# Altium PCB Main.PcbDoc (part 2 of 2)
Units mil, origin at the board's own origin, x right, y up, seen from the top; angles counter-clockwise.
Board outline 5100 x 2800 mil, 4 copper layers (Top Layer, Internal Plane 1, Internal Plane 2, Bottom Layer), stack 30.634 mil thick; 235 components, 176 nets, 754 pads, 178 vias.
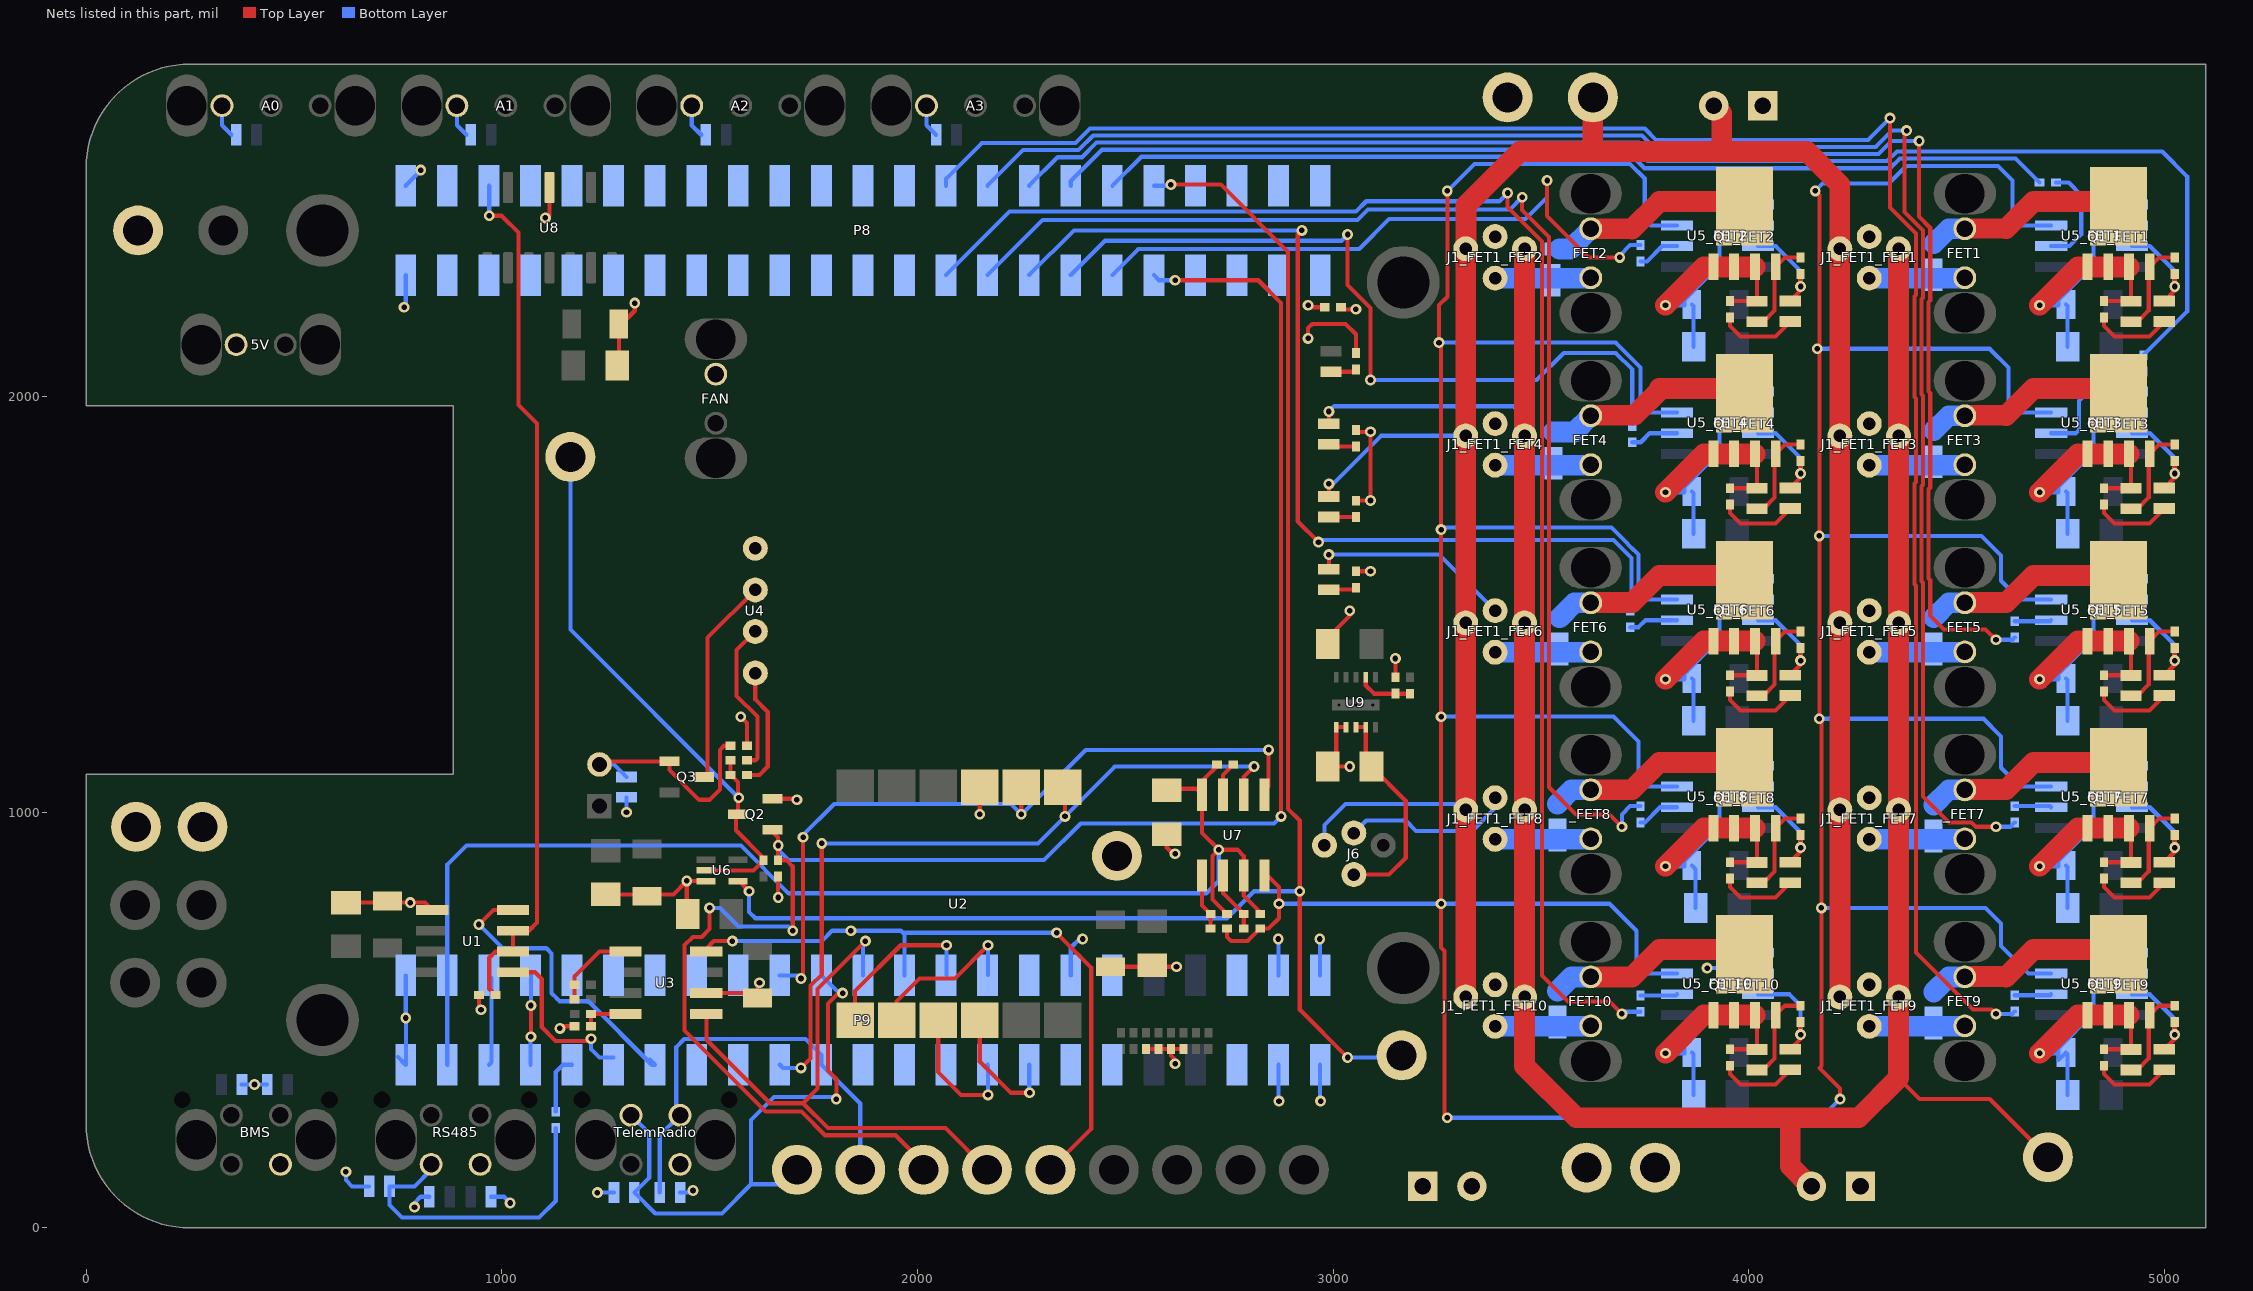
[diagram p4: the nets of this part, all layers, seen from the top]

## Via types
v1: diameter 26, hole 13.5, Top Layer to Bottom Layer, 173 vias
v2: diameter 40.16, hole 40.16, Top Layer to Bottom Layer, 3 vias
v3: diameter 175, hole 125, Top Layer to Bottom Layer, 2 vias

## Nets (pads, with @x,y where several pads share a name; then routed paths per layer and width w, separated by ;. In a path a pad name is that pad's centre, name@x,y a point inside that pad or via, vN(x,y) a via of type N, cw(c..) or ccw(c..) an arc to the next point about the centre after c; other vN are vias at no path point) (continued)
GND: 5V.1 A0.1 A1.1 A2.1 A3.1 BMS.1 C1.1 C2.1 C3.1 C4.1 C5.1 C6.1 C7.1 C8.1 C9.1 C11.1 C12.1 D9.3 D10.1 D11.3 D12.3 D13.3 D14.3 D15.3 D16.3 D17.3 D18.3 D19.3 D20.3 FAN.1 L1.1 P8.1 P8.2 P9.1 P9.2 P9.34 P9.43 P9.44 P9.45 P9.46 Q2.2 R6.2 R8.2 R15.1 R16.1 R17.1 R18.1 R23.2 R24.2 R29.1 R30.1 R35.2 RS485.1 TelemRadio.1 TP7.1 TP9.1 TP15.1 TP18.1 U1.5 U2.3 U3.2 U4.4 U5_FET1.3 U5_FET2.3 U5_FET3.3 U5_FET4.3 U5_FET5.3 U5_FET6.3 U5_FET7.3 U5_FET8.3 U5_FET9.3 U5_FET10.3 U6.3 U7.4 U8.11 | length 16310.2
  Top Layer w10: C4.1@625,782.6 v1(780,782.6) 815.16,782.6 U1.5@832.76,765 ; R6.2@945.31,560 945.31,529.69 v1(950,525) ; v1(1105,2430) 1105,2425 1115,2435 U8.11@1115,2503.31 ; v1@1150,485 R8.2@1175.31,485 ; C12.1@1250,802.4 1412.99,802.4 v1@1445,834.41 ; C2.1@1277.6,2075 1281.69,2079.09 C1.1@1281.69,2168.31 ; C1.1@1281.69,2175 C1.1@1281.69,2168.31 ; v1(1320,2225) 1320,2206.61 C1.1@1281.69,2168.31 ; C8.1@1447.4,755 1445,757.4 v1@1445,834.41 ; U6.3@1491.81,834.41 v1@1445,834.41 ; U3.2@1492.24,565 1603.31,565 C7.1@1615,553.31 1615,585 v1(1620,590) ; v1(1575,1230) 1590,1215 R24.2@1590,1160 ; Q2.2@1646.73,1032.4 Q2.2@1651.73,1032.4 1707.6,1032.4 v1(1710,1030) ; v1(1665,795) R23.2@1665,845.31 ; v1(2150,995) U2.3@2150,1060 ; C5.1@2465,628.31 v1(2623.31,628.31) ; R16.1@2550,430.32 R17.1@2580,430.32 R18.1@2610,430.32 ; C9.1@2600,943.31 2600,915 v1@2615,900 ; v1(2620,395) 2620,405 2610,415 R18.1@2610,430.32 ; R15.1@2640,430.32 R18.1@2610,430.32 ; R30.1@2744.69,720 2744.69,700.32 2755,690 2794.69,690 R29.1@2824.69,720 2845,720 2870,745 v1(2870,780) 2870,820 2842.24,847.76 U7.4@2835,847.76 ; v1(2940,2140) 2940,2165 2950,2175 3030,2175 3055,2150 R35.2@3055,2104.69 ; v1(2940,2220) 2945,2215 L1.1@2980,2215 ; v1(3275,265) 3268.5,271.5 3268.5,666.21 3260,674.71 v1(3260,780) v1(3260,1230) v1(3260,1680) 3260,2125 v1(3255,2130) 3255,2220.29 3275,2240.29 v1(3275,2495) ; v1(4160,2495) 4170,2485 v1@4170,2110 ; v1(4165,2115) v1@4170,2110 ; v1(4220,310) 4220,335 4170,385 4175,390 v1(4175,770) 4175,1220 v1(4170,1225) v1(4170,1665) v1@4170,2110
  Bottom Layer w10: A0.1@327,2700 327,2653 D12.3@350,2630 ; D20.3@374.21,345 D20.3@375,345 v1(405,345) D19.3@435,345 ; v1(625,135) 625,115 640,100 D11.3@680.79,100 ; P9.1@750,411.52 P9.1@769,392.52 P9.1@769,399.52 ; v1(765,2215) 769,2219 P8.1@769,2292.52 ; v1(769,505) P9.2@769,607.48 ; P8.2@769,2507.48 805,2543.48 v1(805,2545) ; P9.1@770,402.52 v1@770,505 ; v1(790,50) 790,60 805,75 D9.3@825.79,75 ; A1.1@892,2700 892,2653 D13.3@915,2630 ; D10.1@974.21,75 1005,75 v1(1020,60) ; v1(1230,85) D18.3@1270,85 ; v1(1300,1000) D16.3@1300,1035.79 ; D17.3@1429.21,85 1455,85 v1(1460,90) ; A2.1@1457,2700 1457,2653 D14.3@1480,2630 ; A3.1@2022,2700 2022,2653 D15.3@2045,2630 ; P9.34@2369,607.48 2369,674 2390,695 v1(2397.5,695) ; P9.43@2869,392.52 2869,306 v1(2870,305) ; P9.44@2869,607.48 v1@2869,694 ; v1(2870,780) v1(3260,780) 3665,780 3730,715 3730,634.02 3752.01,612.01 U5_FET10.3@3827.76,612.01 ; P9.45@2969,392.52 2969,306 v1(2970,305) ; P9.46@2969,607.48 v1@2969,694 ; v1(3255,2130) 3680,2130 3740,2070 3740,1974.02 3752.01,1962.01 U5_FET4.3@3827.76,1962.01 ; v1(3260,1230) 3675,1230 3735,1170 3735,1079.02 3752.01,1062.01 U5_FET8.3@3827.76,1062.01 ; v1(3260,1680) 3265,1685 3670,1685 3710,1645 3710,1644.64 3724.64,1630 3725,1630 3735,1620 3735,1529.02 3752.01,1512.01 U5_FET6.3@3827.76,1512.01 ; v1(3275,265) 4175,265 v1(4220,310) ; v1(3275,2495) 3340,2560 3714.79,2560 3750,2524.79 3750,2427.01 3765,2412.01 U5_FET2.3@3827.76,2412.01 ; v1(4160,2495) 4178,2513 4337.04,2513 4379.04,2555 4600,2555 4635,2520 4635,2429.02 4652.01,2412.01 U5_FET1.3@4727.76,2412.01 ; v1(4165,2115) 4580,2115 4625,2070 4625,1989.02 4652.01,1962.01 U5_FET3.3@4727.76,1962.01 ; v1(4170,1225) 4565,1225 4605,1185 4605,1184.64 4607,1182.64 4607,1107.02 4652.01,1062.01 U5_FET7.3@4727.76,1062.01 ; v1(4170,1665) 4560,1665 4607,1618 4607,1557.02 4652.01,1512.01 U5_FET5.3@4727.76,1512.01 ; v1(4175,770) 4570,770 4600,740 4600,739.64 4607,732.64 4607,678 4672.99,612.01 U5_FET9.3@4727.76,612.01
  other v1: 1140,480 2868,695 2968,695 1445,835 2620,900
Net_FET1_1: D1_FET1.1 FET1.1 J1_FET1_FET1.4 | length 230.4
  Bottom Layer w10: FET1.1@4519,2285 FET1.1@4520,2286
  Bottom Layer w50: J1_FET1_FET1.4@4290,2285 FET1.1@4519,2285
Net_FET1_2: D1_FET1.3 FET1.2 Q1_FET1.1 | length 532.9
  Top Layer w10: Q1_FET1.1@4915,2458.07 Q1_FET1.1@4943.94,2487.01
  Top Layer w50: FET1.2@4520.01,2405 4619.35,2404 4685,2469.65 4878.43,2469.65 Q1_FET1.1@4890,2458.07
  Bottom Layer w50: D1_FET1.3@4445,2367.8 4481.2,2404 FET1.2@4520,2404
Net_FET2_1: D1_FET2.1 FET2.1 J1_FET1_FET2.4 | length 230.4
  Bottom Layer w10: FET2.1@3619,2285 FET2.1@3620,2286
  Bottom Layer w50: J1_FET1_FET2.4@3390,2285 FET2.1@3619,2285
Net_FET2_2: D1_FET2.3 FET2.2 Q1_FET2.1 | length 538.2
  Top Layer w10: Q1_FET2.1@4015,2458.07 Q1_FET2.1@4043.94,2487.01
  Top Layer w50: FET2.2@3620,2404 3719.35,2404 ; 3719.35,2403 3785,2468.65 ; 3785,2469.65 3978.43,2469.65 Q1_FET2.1@3990,2458.07
  Bottom Layer w50: 3545,2355 3571,2355 FET2.2@3620,2404
Net_FET3_1: D1_FET3.1 FET3.1 J1_FET1_FET3.4 | length 230.4
  Bottom Layer w10: FET3.1@4519,1835 FET3.1@4520,1836
  Bottom Layer w50: J1_FET1_FET3.4@4290,1835 FET3.1@4519,1835
Net_FET3_2: D1_FET3.3 FET3.2 Q1_FET3.1 | length 532.9
  Top Layer w10: Q1_FET3.1@4915,2008.07 Q1_FET3.1@4943.94,2037.01
  Top Layer w50: FET3.2@4520,1955 4619.35,1955 ; 4619.35,1954 4685,2019.65 4878.43,2019.65 Q1_FET3.1@4890,2008.07
  Bottom Layer w50: D1_FET3.3@4445,1917.8 4481.2,1954 FET3.2@4520,1954
Net_FET4_1: D1_FET4.1 FET4.1 J1_FET1_FET4.4 | length 230.4
  Bottom Layer w10: FET4.1@3619,1835 FET4.1@3620,1836
  Bottom Layer w50: J1_FET1_FET4.4@3390,1835 FET4.1@3619,1835
Net_FET4_2: D1_FET4.3 FET4.2 Q1_FET4.1 | length 553.7
  Top Layer w10: Q1_FET4.1@4015,2008.07 Q1_FET4.1@4043.94,2037.01
  Top Layer w50: FET4.2@3620,1955 3725.35,1955 3790,2019.65 ; 3785,2019.65 3790,2019.65 ; Q1_FET4.1@3990,2008.07 3978.43,2019.65 3790,2019.65
  Bottom Layer w50: D1_FET4.3@3530,1914.8 3580.8,1914.8 FET4.2@3620,1954
Net_FET5_1: D1_FET5.1 FET5.1 J1_FET1_FET5.4 | length 230.4
  Bottom Layer w10: FET5.1@4519,1385 FET5.1@4520,1386
  Bottom Layer w50: J1_FET1_FET5.4@4290,1385 FET5.1@4519,1385
Net_FET5_2: D1_FET5.3 FET5.2 Q1_FET5.1 | length 532.9
  Top Layer w10: Q1_FET5.1@4915,1558.07 Q1_FET5.1@4943.94,1587.01
  Top Layer w50: FET5.2@4520,1505 4619.35,1505 ; 4619.35,1504 4685,1569.65 4878.43,1569.65 Q1_FET5.1@4890,1558.07
  Bottom Layer w50: D1_FET5.3@4445,1467.8 4481.2,1504 FET5.2@4520,1504
Net_FET6_1: D1_FET6.1 FET6.1 J1_FET1_FET6.4 | length 230.4
  Bottom Layer w10: FET6.1@3619,1385 FET6.1@3620,1386
  Bottom Layer w50: J1_FET1_FET6.4@3390,1385 FET6.1@3619,1385
Net_FET6_2: D1_FET6.3 FET6.2 Q1_FET6.1 | length 532.9
  Top Layer w10: Q1_FET6.1@4015,1558.07 Q1_FET6.1@4043.94,1587.01
  Top Layer w50: FET6.2@3620,1505 3719.35,1505 ; 3719.35,1504 3785,1569.65 3978.43,1569.65 Q1_FET6.1@3990,1558.07
  Bottom Layer w50: D1_FET6.3@3545,1467.8 3581.2,1504 FET6.2@3620,1504
Net_FET7_1: _FET7.1 D1_FET7.1 J1_FET1_FET7.4 | length 230.4
  Bottom Layer w10: _FET7.1@4519,935 _FET7.1@4520,936
  Bottom Layer w50: J1_FET1_FET7.4@4290,935 _FET7.1@4519,935
Net_FET7_2: _FET7.2 D1_FET7.3 Q1_FET7.1 | length 532.9
  Top Layer w10: Q1_FET7.1@4915,1108.07 Q1_FET7.1@4943.94,1137.01
  Top Layer w50: _FET7.2@4520,1055 4619.35,1055 ; 4619.35,1054 4685,1119.65 4878.43,1119.65 Q1_FET7.1@4890,1108.07
  Bottom Layer w50: D1_FET7.3@4445,1017.8 4481.2,1054 _FET7.2@4520,1054
Net_FET8_1: _FET8.1 D1_FET8.1 J1_FET1_FET8.4 | length 230.4
  Bottom Layer w10: _FET8.1@3619,935 _FET8.1@3620,936
  Bottom Layer w50: J1_FET1_FET8.4@3390,935 _FET8.1@3619,935
Net_FET8_2: _FET8.2 D1_FET8.3 Q1_FET8.1 | length 537
  Top Layer w10: Q1_FET8.1@4015,1108.07 Q1_FET8.1@4043.94,1137.01
  Top Layer w50: _FET8.2@3620,1054 3719.35,1054 3785,1119.65 3978.43,1119.65 Q1_FET8.1@3990,1108.07
  Bottom Layer w50: D1_FET8.3@3540,1020 3574,1054 _FET8.2@3620,1054
Net_FET9_1: D1_FET9.1 FET9.1 J1_FET1_FET9.4 | length 230.4
  Bottom Layer w10: FET9.1@4519,485 FET9.1@4520,486
  Bottom Layer w50: J1_FET1_FET9.4@4290,485 FET9.1@4519,485
Net_FET9_2: D1_FET9.3 FET9.2 Q1_FET9.1 | length 532.9
  Top Layer w10: Q1_FET9.1@4915,658.07 Q1_FET9.1@4943.94,687.01
  Top Layer w50: FET9.2@4520,605 4619.35,605 ; 4619.35,604 4685,669.65 4878.43,669.65 Q1_FET9.1@4890,658.07
  Bottom Layer w50: D1_FET9.3@4445,567.8 4481.2,604 FET9.2@4520,604
Net_FET10_1: D1_FET10.1 FET10.1 J1_FET1_FET10.4 | length 230.4
  Bottom Layer w10: FET10.1@3619,485 FET10.1@3620,486
  Bottom Layer w50: J1_FET1_FET10.4@3390,485 FET10.1@3619,485
Net_FET10_2: D1_FET10.3 FET10.2 Q1_FET10.1 | length 537.3
  Top Layer w10: Q1_FET10.1@4015,658.07 Q1_FET10.1@4043.94,687.01
  Top Layer w50: FET10.2@3620,604 3719.35,604 3785.35,670 3978.07,670 Q1_FET10.1@3990,658.07
  Bottom Layer w50: D1_FET10.3@3540,570 3574,604 FET10.2@3620,604
NetC10_2: C10.2 J6.4 U9.3 U9.4 | length 520.1
  Top Layer w10: J6.4@3050,850 3135,850 3175,890 3175,1027.6 C10.2@3092.6,1110 3078.62,1123.98 U9.4@3078.62,1204.96 U9.3@3055,1204.96
NetCommsDisable_2: CommsDisable.2 D16.1 Q3.1 R24.1 | length 556
  Top Layer w10: CommsDisable.2@1235,1115 1242.4,1122.4 Q3.1@1403.27,1122.4 1403.27,1101.73 1475,1030 1500,1030 1525,1055 1525,1150 1535,1160 R24.1@1550.63,1160
  Bottom Layer w10: CommsDisable.2@1235,1115 1270,1115 D16.1@1300,1085
NetD3_FET1_1: D3_FET1.1 Q1_FET1.2 R22_FET1.2 | length 230.3
  Top Layer w10: D3_FET1.1@4920,2180 4935,2180 4962.41,2207.41 4962.41,2312.01 Q1_FET1.2@4965,2312.01 4987.68,2334.69 R22_FET1.2@5025,2334.69
NetD3_FET2_1: D3_FET2.1 Q1_FET2.2 R22_FET2.2 | length 230.3
  Top Layer w10: D3_FET2.1@4020,2180 4035,2180 4062.41,2207.41 4062.41,2312.01 Q1_FET2.2@4065,2312.01 4087.68,2334.69 R22_FET2.2@4125,2334.69
NetD3_FET3_1: D3_FET3.1 Q1_FET3.2 R22_FET3.2 | length 230.3
  Top Layer w10: D3_FET3.1@4920,1730 4935,1730 4962.41,1757.41 4962.41,1862.01 Q1_FET3.2@4965,1862.01 4987.68,1884.69 R22_FET3.2@5025,1884.69
NetD3_FET4_1: D3_FET4.1 Q1_FET4.2 R22_FET4.2 | length 230.3
  Top Layer w10: D3_FET4.1@4020,1730 4035,1730 4062.41,1757.41 4062.41,1862.01 Q1_FET4.2@4065,1862.01 4087.68,1884.69 R22_FET4.2@4125,1884.69
NetD3_FET5_1: D3_FET5.1 Q1_FET5.2 R22_FET5.2 | length 230.3
  Top Layer w10: D3_FET5.1@4920,1280 4935,1280 4962.41,1307.41 4962.41,1412.01 Q1_FET5.2@4965,1412.01 4987.68,1434.69 R22_FET5.2@5025,1434.69
NetD3_FET6_1: D3_FET6.1 Q1_FET6.2 R22_FET6.2 | length 230.3
  Top Layer w10: D3_FET6.1@4020,1280 4035,1280 4062.41,1307.41 4062.41,1412.01 Q1_FET6.2@4065,1412.01 4087.68,1434.69 R22_FET6.2@4125,1434.69
NetD3_FET7_1: D3_FET7.1 Q1_FET7.2 R22_FET7.2 | length 230.3
  Top Layer w10: D3_FET7.1@4920,830 4935,830 4962.41,857.41 4962.41,962.01 Q1_FET7.2@4965,962.01 4987.68,984.69 R22_FET7.2@5025,984.69
NetD3_FET8_1: D3_FET8.1 Q1_FET8.2 R22_FET8.2 | length 230.3
  Top Layer w10: D3_FET8.1@4020,830 4035,830 4062.41,857.41 4062.41,962.01 Q1_FET8.2@4065,962.01 4087.68,984.69 R22_FET8.2@4125,984.69
NetD3_FET9_1: D3_FET9.1 Q1_FET9.2 R22_FET9.2 | length 230.3
  Top Layer w10: D3_FET9.1@4920,380 4935,380 4962.41,407.41 4962.41,512.01 Q1_FET9.2@4965,512.01 4987.68,534.69 R22_FET9.2@5025,534.69
NetD3_FET10_1: D3_FET10.1 Q1_FET10.2 R22_FET10.2 | length 230.3
  Top Layer w10: D3_FET10.1@4020,380 4035,380 4062.41,407.41 4062.41,512.01 Q1_FET10.2@4065,512.01 4087.68,534.69 R22_FET10.2@4125,534.69
NetD4_FET1_1: D4_FET1.1 R22_FET1.1 U5_FET1.6 U5_FET1.7 | length 290.3
  Top Layer w10: D4_FET1.1@5000,2230 5025,2255 R22_FET1.1@5025,2295.31
  Bottom Layer w10: U5_FET1.6@4922.24,2412.01 U5_FET1.7@4922.24,2362.01 4965,2362.01 5025,2302.01 v1(5025,2265)
NetD4_FET1_3: D4_FET1.3 R36_FET1.2 | length 190.5
  Top Layer w10: R36_FET1.2@4855,2190.31 4855,2170 4880,2145 4964.21,2145 D4_FET1.3@5000,2180.79
NetD4_FET2_1: D4_FET2.1 R22_FET2.1 U5_FET2.6 U5_FET2.7 | length 290.3
  Top Layer w10: D4_FET2.1@4100,2230 4125,2255 R22_FET2.1@4125,2295.31
  Bottom Layer w10: U5_FET2.6@4022.24,2412.01 U5_FET2.7@4022.24,2362.01 4065,2362.01 4125,2302.01 v1(4125,2265)
NetD4_FET2_3: D4_FET2.3 R36_FET2.2 | length 190.5
  Top Layer w10: R36_FET2.2@3955,2190.31 3955,2170 3980,2145 4064.21,2145 D4_FET2.3@4100,2180.79
NetD4_FET3_1: D4_FET3.1 R22_FET3.1 U5_FET3.6 U5_FET3.7 | length 290.3
  Top Layer w10: D4_FET3.1@5000,1780 5025,1805 R22_FET3.1@5025,1845.32
  Bottom Layer w10: U5_FET3.6@4922.24,1962.01 U5_FET3.7@4922.24,1912.01 4965,1912.01 5025,1852.01 v1(5025,1815)
NetD4_FET3_3: D4_FET3.3 R36_FET3.2 | length 190.5
  Top Layer w10: R36_FET3.2@4855,1740.31 4855,1720 4880,1695 4964.21,1695 D4_FET3.3@5000,1730.79
NetD4_FET4_1: D4_FET4.1 R22_FET4.1 U5_FET4.6 U5_FET4.7 | length 290.3
  Top Layer w10: D4_FET4.1@4100,1780 4125,1805 R22_FET4.1@4125,1845.32
  Bottom Layer w10: U5_FET4.6@4022.24,1962.01 U5_FET4.7@4022.24,1912.01 4065,1912.01 4125,1852.01 v1(4125,1815)
NetD4_FET4_3: D4_FET4.3 R36_FET4.2 | length 190.5
  Top Layer w10: R36_FET4.2@3955,1740.31 3955,1720 3980,1695 4064.21,1695 D4_FET4.3@4100,1730.79
NetD4_FET5_1: D4_FET5.1 R22_FET5.1 U5_FET5.6 U5_FET5.7 | length 290.3
  Top Layer w10: D4_FET5.1@5000,1330 5025,1355 R22_FET5.1@5025,1395.32
  Bottom Layer w10: U5_FET5.6@4922.24,1512.01 U5_FET5.7@4922.24,1462.01 4965,1462.01 5025,1402.01 v1(5025,1365)
NetD4_FET5_3: D4_FET5.3 R36_FET5.2 | length 190.5
  Top Layer w10: R36_FET5.2@4855,1290.31 4855,1270 4880,1245 4964.21,1245 D4_FET5.3@5000,1280.79
NetD4_FET6_1: D4_FET6.1 R22_FET6.1 U5_FET6.6 U5_FET6.7 | length 290.3
  Top Layer w10: D4_FET6.1@4100,1330 4125,1355 R22_FET6.1@4125,1395.32
  Bottom Layer w10: U5_FET6.6@4022.24,1512.01 U5_FET6.7@4022.24,1462.01 4065,1462.01 4125,1402.01 v1(4125,1365)
NetD4_FET6_3: D4_FET6.3 R36_FET6.2 | length 190.5
  Top Layer w10: R36_FET6.2@3955,1290.31 3955,1270 3980,1245 4064.21,1245 D4_FET6.3@4100,1280.79
NetD4_FET7_1: D4_FET7.1 R22_FET7.1 U5_FET7.6 U5_FET7.7 | length 290.3
  Top Layer w10: D4_FET7.1@5000,880 5025,905 R22_FET7.1@5025,945.32
  Bottom Layer w10: U5_FET7.6@4922.24,1062.01 U5_FET7.7@4922.24,1012.01 4965,1012.01 5025,952.01 v1(5025,915)
NetD4_FET7_3: D4_FET7.3 R36_FET7.2 | length 190.5
  Top Layer w10: R36_FET7.2@4855,840.31 4855,820 4880,795 4964.21,795 D4_FET7.3@5000,830.79
NetD4_FET8_1: D4_FET8.1 R22_FET8.1 U5_FET8.6 U5_FET8.7 | length 290.3
  Top Layer w10: D4_FET8.1@4100,880 4125,905 R22_FET8.1@4125,945.32
  Bottom Layer w10: U5_FET8.6@4022.24,1062.01 U5_FET8.7@4022.24,1012.01 4065,1012.01 4125,952.01 v1(4125,915)
NetD4_FET8_3: D4_FET8.3 R36_FET8.2 | length 190.5
  Top Layer w10: R36_FET8.2@3955,840.31 3955,820 3980,795 4064.21,795 D4_FET8.3@4100,830.79
NetD4_FET9_1: D4_FET9.1 R22_FET9.1 U5_FET9.6 U5_FET9.7 | length 290.3
  Top Layer w10: D4_FET9.1@5000,430 5025,455 R22_FET9.1@5025,495.32
  Bottom Layer w10: U5_FET9.6@4922.24,612.01 U5_FET9.7@4922.24,562.01 4965,562.01 5025,502.01 v1(5025,465)
NetD4_FET9_3: D4_FET9.3 R36_FET9.2 | length 190.5
  Top Layer w10: R36_FET9.2@4855,390.31 4855,370 4880,345 4964.21,345 D4_FET9.3@5000,380.79
NetD4_FET10_1: D4_FET10.1 R22_FET10.1 U5_FET10.6 U5_FET10.7 | length 309.6
  Top Layer w10: D4_FET10.1@4100,430 4125,455 R22_FET10.1@4125,495.32
  Bottom Layer w10: U5_FET10.6@4022.24,612.01 U5_FET10.7@4022.24,562.01 4097.99,562.01 4125,535 v1(4125,465)
NetD4_FET10_3: D4_FET10.3 R36_FET10.2 | length 190.5
  Top Layer w10: R36_FET10.2@3955,390.31 3955,370 3980,345 4064.21,345 D4_FET10.3@4100,380.79
NetD5_3: D5.3 R33.1 | length 66.9
  Top Layer w10: D5.3@2990,1535.79 3050.47,1535.79 R33.1@3055,1540.32
NetD6_3: D6.3 R32.1 | length 66.9
  Top Layer w10: D6.3@2990,1705.79 2994.53,1710.32 R32.1@3055,1710.32
NetD7_3: D7.3 R34.1 | length 65.1
  Top Layer w10: D7.3@2990,1880 3054.68,1880 R34.1@3055,1880.32
NetD8_3: D8.3 R35.1 | length 69.7
  Top Layer w10: D8.3@2989.69,2065.32 D8.3@2995,2060 3049.68,2060 R35.1@3055,2065.32
NetP8_3: P8.3
NetP8_4: P8.4
NetP8_5: P8.5
NetP8_7: P8.7
NetP8_8: P8.8
NetP8_9: P8.9
NetP8_10: P8.10
NetP8_11: P8.11
NetP8_12: P8.12
NetP8_13: P8.13
NetP8_14: P8.14
NetP8_15: P8.15
NetP8_16: P8.16
NetP8_17: P8.17
NetP8_18: P8.18
NetP8_19: P8.19
NetP8_20: P8.20
NetP8_21: P8.21
NetP8_22: P8.22
NetP8_23: P8.23
NetP8_24: P8.24
NetP8_25: P8.25
NetP8_26: P8.26
NetP8_39: P8.39
NetP8_40: P8.40
NetP8_41: P8.41
NetP8_42: P8.42
NetP8_43: P8.43
NetP8_44: P8.44
NetP8_45: P8.45
NetP8_46: P8.46
NetP9_10: P9.10
NetP9_12: P9.12
NetP9_14: P9.14
NetP9_15: P9.15
NetP9_16: P9.16
NetP9_17: P9.17
NetP9_18: P9.18
NetP9_23: P9.23
NetP9_25: P9.25
NetP9_27: P9.27
NetP9_33: P9.33
NetP9_35: P9.35
NetP9_36: P9.36
NetP9_41: P9.41
NetP9_42: P9.42
NetQ2_3: Q2.3 R19.2 R20.1 R21.1 TP17.1 U6.2 | length 1411.4
  Top Layer w10: U6.2@1491.81,860 1605.31,860 R19.2@1630,884.69 1630,890 1563.27,956.73 Q2.3@1563.27,995 ; R21.1@1550.63,1125 R20.1@1550.63,1090 1568.27,1072.36 Q2.3@1568.27,995
  Bottom Layer w10: TP17.1@1165,1855 1165,1440 v1(1570,1035)
NetQ3_3: Q3.3 U4.3 | length 501.1
  Top Layer w10: Q3.3@1486.73,1085 1495,1093.27 1495,1420 U4.3@1610,1535
NetR1_FET1_2: R1_FET1.2 U5_FET1.2 | length 251.9
  Bottom Layer w10: U5_FET1.2@4727.76,2362.01 4772.01,2362.01 4800,2390 4800,2485 4770,2515 R1_FET1.2@4739.37,2515
NetR1_FET2_2: R1_FET2.2 U5_FET2.2 | length 103
  Bottom Layer w10: R1_FET2.2@3740,2325.31 3755.31,2325.31 3792.01,2362.01 U5_FET2.2@3827.76,2362.01
NetR1_FET3_2: R1_FET3.2 U5_FET3.2 | length 324.7
  Bottom Layer w10: U5_FET3.2@4727.76,1912.01 4787.01,1912.01 4795,1920 4795,1990 4865.31,2060.31 R1_FET3.2@4950,2060.31
NetR1_FET4_2: R1_FET4.2 U5_FET4.2 | length 116.7
  Bottom Layer w10: R1_FET4.2@3720,1890.31 3740.31,1890.31 3762.01,1912.01 U5_FET4.2@3827.76,1912.01
NetR1_FET5_2: R1_FET5.2 U5_FET5.2 | length 88.7
  Bottom Layer w10: R1_FET5.2@4640,1459.69 4725.43,1459.69 U5_FET5.2@4727.76,1462.01
NetR1_FET6_2: R1_FET6.2 U5_FET6.2 | length 119.7
  Bottom Layer w10: R1_FET6.2@3715,1445.31 3735.31,1445.31 3752.01,1462.01 U5_FET6.2@3827.76,1462.01
NetR1_FET7_2: R1_FET7.2 U5_FET7.2 | length 88.9
  Bottom Layer w10: R1_FET7.2@4640,1014.69 4725.08,1014.69 U5_FET7.2@4727.76,1012.01
NetR1_FET8_2: R1_FET8.2 U5_FET8.2 | length 103
  Bottom Layer w10: R1_FET8.2@3740,975.31 3750.31,975.31 3787.01,1012.01 U5_FET8.2@3827.76,1012.01
NetR1_FET9_2: R1_FET9.2 U5_FET9.2 | length 88.7
  Bottom Layer w10: R1_FET9.2@4640,559.69 4725.43,559.69 U5_FET9.2@4727.76,562.01
NetR1_FET10_2: R1_FET10.2 U5_FET10.2 | length 88.8
  Bottom Layer w10: R1_FET10.2@3740,559.37 3825.12,559.37 U5_FET10.2@3827.76,562.01
NetR7_2: R7.2 R8.1 U3.8 | length 112.9
  Top Layer w10: R8.1@1214.68,485 1215,485.31 R7.2@1215,515 U3.8@1297.76,515
NetR9_2: R9.2 R10.1 U3.5 | length 202.5
  Top Layer w10: R9.2@1175.31,550 1175.31,595 1175.32,605.32 1235,665 U3.5@1297.76,665
NetR20_2: R20.2 U4.1 | length 295.7
  Top Layer w10: R20.2@1590,1090 1620,1090 1640,1110 1640,1241.61 1610,1271.61 U4.1@1610,1335
NetR21_2: R21.2 U4.2 | length 371.4
  Top Layer w10: R21.2@1590,1125 1610,1125 1615,1130 1615,1230 1565,1280 1565,1390 U4.2@1610,1435
NetR27_1: R27.1 R29.2 U7.2 | length 148.6
  Top Layer w10: U7.2@2735,847.76 2735,805.32 R27.1@2785.31,755 R29.2@2785.31,720
NetR28_1: R28.1 R30.2 U7.1 | length 136.4
  Top Layer w10: U7.1@2685,847.76 2685,775.63 R28.1@2705.63,755 2705.31,754.68 R30.2@2705.31,720
NetR31_2: R31.2 U7.7 | length 83.1
  Top Layer w10: U7.7@2735,1042.24 2735,1090 R31.2@2760,1115
NetR37_1: R37.1 R38.2 U9.7 | length 134.4
  Top Layer w10: U9.7@3078.62,1325.04 3078.62,1305.27 3098.57,1285.32 R37.1@3185,1285.32
P8.6: P8.6 R6.1 U1.2 U1.3 | length 2113.7
  Top Layer w10: v1(970,2435) 1000,2435 1040,2395 1040,1980 1085,1935 1085,735 1065,715 U1.3@1027.24,715 U1.2@1027.24,665 985,665 970,650 970,574.68 R6.1@984.68,560
  Bottom Layer w10: P8.6@969,2507.48 970,2506.48 v1(970,2435)
P8.27: P8.27 R1_FET10.1 | length 3627.4
  Top Layer w10: v1(3420,2490) 3420,2455.82 3502.71,2373.11 3502.71,607.29 3565,545 3665,545 v1(3695,515)
  Bottom Layer w10: P8.27@2069,2292.52 2221.48,2445 3055,2445 3080,2470 3400,2470 v1(3420,2490) ; v1(3695,515) 3700,520 R1_FET10.1@3740,520
P8.28: P8.28 R1_FET9.1 | length 4701.1
  Top Layer w10: v1@4340,2660 4340,2455 4402.71,2392.29 4402.71,2244.98 4399,2241.26 4399,1998.74 4402.71,1995.02 4402.71,1794.98 4399,1791.26 4399,1548.74 4402.71,1545.02 4402.71,662.29 4539.5,525.5 4584.5,525.5 v1(4595,515)
  Bottom Layer w10: P8.28@2069,2507.48 2069,2524 2155,2610 2380,2610 2415,2645 3750,2645 3777.47,2617.53 4287.53,2617.53 v1(4340,2670) ; v1(4595,515) 4634.69,515 R1_FET9.1@4640,520.32
P8.29: P8.29 R1_FET8.1 | length 3107.6
  Top Layer w10: v1(3455,2479.64) 3455,2449.04 3519.71,2384.33 3519.71,1060.29 3585,995 3665,995 v1(3695,965)
  Bottom Layer w10: P8.29@2169,2292.52 2301.48,2425 3059.04,2425 3084.04,2450 3425.36,2450 v1(3455,2479.64) ; v1(3695,965) 3695,995 3714.69,1014.68 R1_FET8.1@3740,1014.68
P8.30: P8.30 R1_FET7.1 | length 4170.1
  Top Layer w10: v1@4375,2640 4375,2444.04 4419.71,2399.33 4419.71,2237.93 4416,2234.22 4416,2005.78 4419.71,2002.07 4419.71,1787.93 4416,1784.22 4416,1555.78 4419.71,1552.07 4419.71,1038 4482.21,975.5 4536.36,975.5 4546.86,965 v1(4595,965)
  Bottom Layer w10: P8.30@2169,2507.48 2254.52,2593 2388,2593 2423,2628 3742.96,2628 3770.43,2600.53 4305.53,2600.53 4345,2640 v1(4380,2640) ; v1(4595,965) 4629.69,965 R1_FET7.1@4640,975.32
P8.31: P8.31 R1_FET6.1 | length 2374.2
  Top Layer w10: v1(2925,2400) 2915,2390 2915,1700 v1(2965,1650)
  Bottom Layer w10: P8.31@2269,2292.52 2376.48,2400 v1(2925,2400) ; v1(2965,1650) 2970,1655 3675,1655 3718,1612 R1_FET6.1@3718,1486.02
P8.32: P8.32 R1_FET5.1 | length 3596.9
  Top Layer w10: v1(4410,2615) 4410,2433.08 4436.71,2406.37 4436.71,2230.89 4433,2227.18 4433,2012.82 4436.71,2009.11 4436.71,1780.89 4433,1777.18 4433,1562.82 4436.71,1559.11 4436.71,1473.29 4470,1440 4570,1440 v1(4595,1415)
  Bottom Layer w10: P8.32@2269,2507.48 2337.52,2576 2396,2576 2431,2611 3735.92,2611 3763.39,2583.53 4312.57,2583.53 4344.04,2615 v1(4410,2615) ; v1(4595,1415) 4634.69,1415 R1_FET5.1@4640,1420.32
P8.33: P8.33 R1_FET4.1 | length 1883.6
  Top Layer w10: v1(3035,2390) 3035,2268.29 3090,2213.29 v1(3090,2040)
  Bottom Layer w10: P8.33@2369,2292.52 2451.48,2375 3020,2375 v1(3035,2390) ; v1(3090,2040) 3490,2040 3555,2105 3680,2105 3720,2065 R1_FET4.1@3720,1934.02
P8.34: P8.34 R1_FET3.1 | length 3248.3
  Bottom Layer w10: P8.34@2369,2507.48 2369,2519 2444,2594 3728.88,2594 3756.35,2566.53 4333.05,2566.53 4356.52,2590 4995,2590 5055,2530 5055,2204.69 R1_FET3.1@4950,2099.68
P8.35: P8.35 R1_FET2.1 | length 1530.9
  Top Layer w10: v1(3515,2520) 3515,2435 3615,2335 v1(3690,2335)
  Bottom Layer w10: P8.35@2469,2292.52 2531.48,2355 3063.08,2355 3135.08,2427 3463,2427 3515,2479 v1(3515,2520) ; v1(3690,2335) 3690,2340 3714.69,2364.69 R1_FET2.1@3740,2364.69
P8.36: P8.36 R1_FET1.1 | length 2304.9
  Bottom Layer w10: P8.36@2469,2507.48 2538.52,2577 3721.83,2577 3749.31,2549.53 4340.09,2549.53 4363.56,2573 4642,2573 R1_FET1.1@4700,2515
P8.37: P8.37 Q2.1 R23.1 TP16.1 | length 4397.2
  Top Layer w10: v1(1500,770) 1500,718.8 1481.2,700 1459.68,700 1440,680.32 1440,475 1635,280 1720.96,280 1777.96,223 1947,223 2015,155 TP16.1@2015,140 ; Q2.1@1646.73,957.6 1665,939.33 R23.1@1665,884.68 1685.32,884.68 1700,870 v1(1700,715) ; v1(2620,2280) 2820,2280 2875,2225 v1(2875,990)
  Bottom Layer w10: v1(1500,770) 1525,770 1570,725 1690,725 v1(1700,715) ; v1(1665,920) 1665,910 1690,885 2305,885 2393,973 2858,973 v1(2875,990) ; P8.37@2569,2292.52 2581.52,2280 v1(2620,2280)
P8.38: P8.38 TP19.1 U6.4 | length 3965.5
  Top Layer w10: U6.4@1568.19,834.41 1570.59,834.41 v1(1595,810) ; v1(2610,2510) 2730,2510 2892,2348 2892,1008.36 2920,980.36 v1(2920,810) 2920,525 v1(3035,410)
  Bottom Layer w10: v1(1595,810) 1595,760 1610,745 2745,745 2810,810 v1(2920,810) ; P8.38@2569,2507.48 2607.48,2507.48 v1(2610,2510) ; v1(3035,410) 3160,410 TP19.1@3165,415
P9.9: P9.9 R25.1 | length 141.6
  Bottom Layer w10: R25.1@1130,279.68 1130,375 1147.52,392.52 P9.9@1169,392.52
P9.11: P9.11 U1.1 | length 411
  Top Layer w10: U1.1@1027.24,615 1080,615 1096.15,598.85 1096.15,483.49 1129.64,450 v1@1215,450
  Bottom Layer w10: v1(1215,455) 1215,430 1235,410 P9.11@1269,410
P9.13: P9.13 U1.4 | length 734.1
  Top Layer w10: v1(945,730) 980,765 U1.4@1027.24,765
  Bottom Layer w10: v1(945,730) 1002,673 1107,673 1120,660 1120,564.51 1131.51,553 1132,552.51 1139.03,545.48 1208.01,545.48 1360.97,392.52 P9.13@1369,392.52 P9.13@1356.52,405
P9.19: P9.19 U2.1 U7.6 | length 1884.6
  Top Layer w10: v1(1720,385) 1743,408 1743,583 1770,610 v1(1770,925) ; v1(2355,990) U2.1@2355,1065 ; U7.6@2785,1042.24 2785,1085 v1(2810,1110)
  Bottom Layer w10: P9.19@1669,392.52 1676.52,385 v1(1720,385) ; v1(1770,925) 2290,925 v1(2355,990) 2475,1110 v1(2810,1110)
P9.20: P9.20 U2.2 U7.5 | length 1814.9
  Top Layer w10: v1(1720,600) 1725,605 v1(1725,940) ; v1(2250,995) U2.2@2250,1060 ; U7.5@2835,1042.24 2830,1047.24 2845,1062.24 v1(2845,1150)
  Bottom Layer w10: P9.20@1669,607.48 1712.52,607.48 v1(1720,600) ; v1(1725,940) 1720,940 1800,1020 2225,1020 v1(2250,995) 2405,1150 v1(2845,1150)
P9.21: D17.1 P9.21 TelemRadio.3 TP8.1 | length 1062.1
  Bottom Layer w10: D17.1@1380,85 1380,222.06 TelemRadio.3@1429,271.06 1420,280.06 1420,435.49 1439.03,454.52 1730.48,454.52 1769,416 P9.21@1769,392.52 1862.5,299.02 TP8.1@1862.5,140
P9.22: D18.1 P9.22 TelemRadio.4 TP10.1 | length 1413.8
  Top Layer w10: v1(1805,310) 1805,358.75 1785,378.75 1785,539.43 1810.57,565 v1(1820,565)
  Bottom Layer w10: TelemRadio.4@1311,271.06 1355,227.06 1355,120.79 D18.1@1319.21,85 1369.21,35 1530,35 1600,105 ; TP10.1@1710,140 1675,105 1600,105 ; P9.22@1769,607.48 1811.48,565 v1(1820,565) ; v1(1805,310) 1805,315 1655,315 1600,260 1600,105
P9.24: P9.24 TP12.1 U3.1 | length 1404.2
  Top Layer w10: U3.1@1492.24,515 1492.24,452.76 1645,300 1725,300 ; v1(1875,690) 1760,575 1760,335 1725,300 ; TP12.1@2167.5,140 2067.5,240 1785,240 1725,300
  Bottom Layer w10: P9.24@1869,607.48 1869,684 v1(1875,690)
P9.26: P9.26 TP14.1 U3.4 | length 1627.8
  Top Layer w10: U3.4@1492.24,665 1492.24,672.24 1510,690 v1(1555,690) ; TP14.1@2335,125 2335,155 2418.16,238.16 2418.16,626.84 v1(2335,710)
  Bottom Layer w10: v1(1555,690) 1770,690 1795,715 v1(1840,715) 1960,715 1965,710 ; P9.26@1969,607.48 1969,706 1965,710 ; v1(2335,710) 1965,710
P9.28: P9.28 U2.7 | length 407.1
  Top Layer w10: U2.7@1850,499.96 1850,570 1960,680 v1(2070,680)
  Bottom Layer w10: P9.28@2070,608.48 v1(2070,680)
P9.29: P9.29 U2.9 | length 340.7
  Top Layer w10: U2.9@2050,499.96 2050,375 2105,320 v1(2170,320)
  Bottom Layer w10: P9.29@2169,392.52 2170,391.52 v1(2170,320)
P9.30: P9.30 U2.8 | length 392.5
  Top Layer w10: U2.8@1950,499.96 1950,545 2005,600 2090,600 v1(2170,680)
  Bottom Layer w10: P9.30@2170,608.48 v1(2170,680)
P9.31: P9.31 U2.10 | length 319
  Top Layer w10: U2.10@2150,499.96 2150,400 2225,325 v1(2270,325)
  Bottom Layer w10: P9.31@2269,392.52 2269,326 v1(2270,325)
PGND: C10.1 C13_FET1.1 C13_FET2.1 C13_FET3.1 C13_FET4.1 C13_FET5.1 C13_FET6.1 C13_FET7.1 C13_FET8.1 C13_FET9.1 C13_FET10.1 C14_FET1.1 C14_FET2.1 C14_FET3.1 C14_FET4.1 C14_FET5.1 C14_FET6.1 C14_FET7.1 C14_FET8.1 C14_FET9.1 C14_FET10.1 C15.1 D3_FET1.3 D3_FET2.3 D3_FET3.3 D3_FET4.3 D3_FET5.3 D3_FET6.3 D3_FET7.3 D3_FET8.3 D3_FET9.3 D3_FET10.3 L1.2 PWR1.1 PWR2.1 Q1_FET1.3 Q1_FET2.3 Q1_FET3.3 Q1_FET4.3 Q1_FET5.3 Q1_FET6.3 Q1_FET7.3 Q1_FET8.3 Q1_FET9.3 Q1_FET10.3 R32.2 R33.2 R34.2 R36_FET1.1 R36_FET2.1 R36_FET3.1 R36_FET4.1 R36_FET5.1 R36_FET6.1 R36_FET7.1 R36_FET8.1 R36_FET9.1 R36_FET10.1 R38.1 TP26.1 TP27.1 U5_FET1.5 U5_FET2.5 U5_FET3.5 U5_FET4.5 U5_FET5.5 U5_FET6.5 U5_FET7.5 U5_FET8.5 U5_FET9.5 U5_FET10.5 U9.1 U9.2 Vbat.1 | length 9468.4
  Top Layer w10: C15.1@2987.4,1405 2980,1412.4 3040,1472.4 v1(3040,1485) ; L1.2@3019.37,2215 3024.37,2210 v1(3055,2210) ; U9.2@3031.38,1204.96 U9.1@3007.76,1204.96 3007.76,1130.35 C10.1@2987.4,1110 v1(3040,1110) ; R33.2@3055,1579.69 v1@3089.69,1579.69 ; R32.2@3055,1749.69 3089.69,1749.69 v1(3090,1750) v1(3090,1915.31) ; R34.2@3055,1915 v1@3089.69,1915 ; R38.1@3150,1325 v1(3150,1370) ; R36_FET10.1@3955,429.68 4019.53,429.68 D3_FET10.3@4020,429.21 4020,507.01 Q1_FET10.3@4015,512.01 ; R36_FET8.1@3955,879.68 4019.53,879.68 D3_FET8.3@4020,879.21 4020,957.01 Q1_FET8.3@4015,962.01 ; R36_FET6.1@3955,1329.68 4019.53,1329.68 D3_FET6.3@4020,1329.21 4020,1407.01 Q1_FET6.3@4015,1412.01 ; R36_FET4.1@3955,1779.68 4019.53,1779.68 D3_FET4.3@4020,1779.21 4020,1857.01 Q1_FET4.3@4015,1862.01 ; R36_FET2.1@3955,2229.69 4019.53,2229.69 D3_FET2.3@4020,2229.21 4020,2307.01 Q1_FET2.3@4015,2312.01 ; R36_FET9.1@4855,429.68 4919.53,429.68 D3_FET9.3@4920,429.21 4920,507.01 Q1_FET9.3@4915,512.01 ; R36_FET7.1@4855,879.68 4919.53,879.68 D3_FET7.3@4920,879.21 4920,957.01 Q1_FET7.3@4915,962.01 ; R36_FET5.1@4855,1329.68 4919.53,1329.68 D3_FET5.3@4920,1329.21 4920,1407.01 Q1_FET5.3@4915,1412.01 ; R36_FET3.1@4855,1779.68 4919.53,1779.68 D3_FET3.3@4920,1779.21 4920,1857.01 Q1_FET3.3@4915,1862.01 ; R36_FET1.1@4855,2229.69 4919.53,2229.69 D3_FET1.3@4920,2229.21 4920,2307.01 Q1_FET1.3@4915,2312.01
  Top Layer w50: v1(3800,420) 3892.01,512.01 Q1_FET10.3@3915,512.01 Q1_FET10.3@3965,512.01 Q1_FET10.3@4015,512.01 ; v1(3800,870) 3892.01,962.01 Q1_FET8.3@3915,962.01 Q1_FET8.3@3965,962.01 Q1_FET8.3@4015,962.01 ; v1(3800,1320) 3892.01,1412.01 Q1_FET6.3@3915,1412.01 Q1_FET6.3@3965,1412.01 Q1_FET6.3@4015,1412.01 ; v1(3800,1770) 3892.01,1862.01 Q1_FET4.3@3915,1862.01 Q1_FET4.3@3965,1862.01 Q1_FET4.3@4015,1862.01 ; v1(3800,2220) 3892.01,2312.01 Q1_FET2.3@3915,2312.01 Q1_FET2.3@3965,2312.01 Q1_FET2.3@4015,2312.01 ; v1(4700,420) 4792.01,512.01 Q1_FET9.3@4815,512.01 Q1_FET9.3@4865,512.01 Q1_FET9.3@4915,512.01 ; v1(4700,870) 4792.01,962.01 Q1_FET7.3@4815,962.01 Q1_FET7.3@4865,962.01 Q1_FET7.3@4915,962.01 ; v1(4700,1320) 4792.01,1412.01 Q1_FET5.3@4815,1412.01 Q1_FET5.3@4865,1412.01 Q1_FET5.3@4915,1412.01 ; v1(4700,1770) 4792.01,1862.01 Q1_FET3.3@4815,1862.01 Q1_FET3.3@4865,1862.01 Q1_FET3.3@4915,1862.01 ; v1(4700,2220) 4792.01,2312.01 Q1_FET1.3@4815,2312.01 Q1_FET1.3@4865,2312.01 Q1_FET1.3@4915,2312.01
  Bottom Layer w10: v1(3800,420) 3845.31,420 C13_FET10.1@3845.31,432.32 ; v1(3800,870) 3845.31,870 3845.31,882.32 3930,967.01 3930,1072.01 3970,1112.01 U5_FET8.5@4022.24,1112.01 ; v1(3800,1320) 3845.31,1320 3845.31,1332.32 3930,1417.01 3930,1522.01 3970,1562.01 U5_FET6.5@4022.24,1562.01 ; v1(3800,1770) 3845.31,1770 3845.31,1782.32 3930,1867.01 3930,1972.01 3970,2012.01 U5_FET4.5@4022.24,2012.01 ; v1(3800,2220) 3845.31,2220 3845.31,2232.32 3930,2317.01 3930,2422.01 3970,2462.01 U5_FET2.5@4022.24,2462.01 ; C13_FET10.1@3863.31,422.01 3867.4,417.91 C14_FET10.1@3867.4,320 ; C13_FET8.1@3863.31,872.01 3872.4,862.91 C14_FET8.1@3872.4,770 ; C13_FET6.1@3863.31,1322.01 3867.4,1317.91 C14_FET6.1@3867.4,1220 ; C13_FET4.1@3863.31,1772.01 3867.4,1767.91 C14_FET4.1@3867.4,1670 ; C13_FET2.1@3863.31,2222.01 3867.4,2217.91 C14_FET2.1@3867.4,2120 ; v1(3900,625) 3932.99,625 3970,662.01 U5_FET10.5@4022.24,662.01 ; v1(4700,420) C13_FET9.1@4745.31,420 ; v1(4700,870) 4745.31,870 4745.31,882.32 4830,967.01 4830,1072.01 4870,1112.01 U5_FET7.5@4922.24,1112.01 ; v1(4700,1320) 4745.31,1320 4745.31,1332.32 4830,1417.01 4830,1522.01 4870,1562.01 U5_FET5.5@4922.24,1562.01 ; v1(4700,1770) 4745.31,1770 4745.31,1782.32 4830,1867.01 4830,1972.01 4870,2012.01 U5_FET3.5@4922.24,2012.01 ; v1(4700,2220) 4745.31,2220 4745.31,2232.32 4830,2317.01 4830,2422.01 4870,2462.01 U5_FET1.5@4922.24,2462.01 ; C13_FET7.1@4763.31,872.01 4767.4,867.91 C14_FET7.1@4767.4,770 ; C13_FET5.1@4763.31,1322.01 4767.4,1317.91 C14_FET5.1@4767.4,1220 ; C13_FET3.1@4763.31,1772.01 4767.4,1767.91 C14_FET3.1@4767.4,1670 ; C13_FET1.1@4763.31,2222.01 4767.4,2217.91 C14_FET1.1@4767.4,2120 ; C14_FET9.1@4767.4,320 4767.4,417.91 C13_FET9.1@4763.31,422.01 4745.31,404.02 C13_FET9.1@4745.31,420 ; U5_FET9.5@4922.24,662.01 4870,662.01 4830,622.01 4830,517.01 4745.31,432.32 C13_FET9.1@4745.31,420
  other v1: 3090,1580
PWR1: D6.1 J1_FET1_FET1.1 J1_FET1_FET2.1 J1_FET1_FET3.1 J1_FET1_FET4.1 J1_FET1_FET5.1 J1_FET1_FET6.1 J1_FET1_FET7.1 J1_FET1_FET8.1 J1_FET1_FET9.1 J1_FET1_FET10.1 J6.1 PWR1.2 TP23.1 | length 5919.8
  Top Layer w10: D6.1@2990,1755 D6.1@2990,1759.74 v1(2990,1790)
  Top Layer w50: J1_FET1_FET10.1@3319.29,555.71 J1_FET1_FET8.1@3319.29,1005.71 J1_FET1_FET6.1@3319.29,1455.71 J1_FET1_FET4.1@3319.29,1905.71 J1_FET1_FET2.1@3319.29,2355.71 3320,2356.42 3320,2460 3450,2590 4140,2590 4219.29,2510.71 J1_FET1_FET1.1@4219.29,2355.71 J1_FET1_FET3.1@4219.29,1905.71 J1_FET1_FET5.1@4219.29,1455.71 J1_FET1_FET7.1@4219.29,1005.71 4220,1005 4220,556.42 J1_FET1_FET9.1@4219.29,555.71 ; 3620,2595 3625,2600 TP23.1@3625,2720 ; PWR1.2@3916,2700 3935,2681 3935,2605 3927.53,2597.53
  Bottom Layer w10: J6.1@2979.29,920.71 2979.29,969.29 3030,1020 3305,1020 J1_FET1_FET8.1@3319.29,1005.71 ; v1(2990,1790) 3000.04,1790 3115,1904.96 3115,1905.71 J1_FET1_FET4.1@3319.29,1905.71
  Bottom Layer w50: J1_FET1_FET1.1@4216.5,2359.21 J1_FET1_FET1.1@4220,2355.71
PWR2: D7.1 J1_FET1_FET1.3 J1_FET1_FET2.3 J1_FET1_FET3.3 J1_FET1_FET4.3 J1_FET1_FET5.3 J1_FET1_FET6.3 J1_FET1_FET7.3 J1_FET1_FET8.3 J1_FET1_FET9.3 J1_FET1_FET10.3 PWR2.2 TP28.1 | length 6141.9
  Top Layer w10: D7.1@2990,1929.21 D7.1@2990,1934.47 v1(2990,1964.21) ; 4360.71,360.71 4411.42,310 4580,310 TP28.1@4720,170
  Top Layer w50: J1_FET1_FET2.3@3460.71,2355.71 J1_FET1_FET4.3@3460.71,1905.71 J1_FET1_FET6.3@3460.71,1455.71 J1_FET1_FET8.3@3460.71,1005.71 J1_FET1_FET10.3@3460.71,555.71 3460.71,389.71 3585.42,265 4100,265 ; PWR2.2@4149,100 4100,149 4100,265 ; J1_FET1_FET1.3@4360.71,2355.71 J1_FET1_FET3.3@4360.71,1905.71 J1_FET1_FET5.3@4360.71,1455.71 J1_FET1_FET7.3@4360.71,1005.71 J1_FET1_FET9.3@4360.71,555.71 4360.71,360.71 4265,265 4100,265
  Bottom Layer w10: v1(2990,1964.21) 3002.79,1977 3433,1977 3460.71,1949.29 J1_FET1_FET4.3@3460.71,1905.71
SYS_5V: P9.7 P9.8 | length 215.8
  Top Layer w10: v1(1070,460) v1(1070,535)
  Bottom Layer w10: P9.7@1069,392.52 1069,459 v1(1070,460) ; P9.8@1069,607.48 1070,606.48 v1(1070,535)
up/down: D11.1 R25.2 RS485.2 | length 800
  Bottom Layer w10: RS485.2@815,137.94 RS485.2@830,152.94 830,140 790,100 D11.1@730,100 730,55 760,25 1090,25 1130,65 R25.2@1130,240.31
VBat: D5.1 J1_FET1_FET1.2 J1_FET1_FET2.2 J1_FET1_FET3.2 J1_FET1_FET4.2 J1_FET1_FET5.2 J1_FET1_FET6.2 J1_FET1_FET7.2 J1_FET1_FET8.2 J1_FET1_FET9.2 J1_FET1_FET10.2 J6.2 TP24.1 Vbat.2 | length 891.5
  Top Layer w10: D5.1@2990,1585 v1(2990,1620)
  Bottom Layer w10: v1@3000,1620 3255,1620 J1_FET1_FET6.2@3390,1485 ; J6.2@3050,950 3080,980 3175,980 3200,955 3335,955 3390,1010 J1_FET1_FET8.2@3390,1035
VDD_3V3B: C9.2 P9.3 P9.4 R27.2 R28.2 R31.1 U7.3 U7.8 | length 3219.8
  Top Layer w10: C9.2@2600,1056.69 2670.55,1056.69 U7.8@2685,1042.24 ; R31.1@2725,1115 2685,1075 U7.8@2685,1042.24 ; R28.2@2745,755 2710,790 2710,895 v1(2725,910) ; R27.2@2824.69,755 2824.69,760.31 2785,800 U7.3@2785,847.76 2785,895 2770,910 v1(2725,910) ; U7.8@2685,1042.24 2685,950 v1(2725,910)
  Bottom Layer w10: P9.3@869.5,392.02 P9.3@869,392.52 P9.4@869,607.48 869,874 915,920 1575.36,920 1690.36,805 2695,805 2725,835 v1(2725,910)
VDD_5V: P9.5 P9.6 | length 219.9
  Bottom Layer w10: P9.5@969,392.52 975,398.52 975,601.48 P9.6@969,607.48
VDD_ADC: P9.32
pads on no net: 5V.None _FET7.None _FET8.None A0.None A1.None A2.None A3.None BMS.None FAN.None FET1.None FET2.None FET3.None FET4.None FET5.None FET6.None FET9.None FET10.None J6.3 MTG1.1 MTG2.1 MTG3.1 MTG4.1 RS485.None TelemRadio.None U2.4 U2.5 U2.11 U2.12 U5_FET1.1 U5_FET1.4 U5_FET2.1 U5_FET2.4 U5_FET3.1 U5_FET3.4 U5_FET4.1 U5_FET4.4 U5_FET5.1 U5_FET5.4 U5_FET6.1 U5_FET6.4 U5_FET7.1 U5_FET7.4 U5_FET8.1 U5_FET8.4 U5_FET9.1 U5_FET9.4 U5_FET10.1 U5_FET10.4 U6.1 U9.5 U9.8 U9.9 U9.10 U9.11 U9.12 U9.13 U9.14
copper on no net:
  other v2: 4112.36,49.61 3372.64,150.39 3877.36,2649.61
  other v3: 4500,200 4500,2700

## Polygon pours and split planes (outlines as drawn)
12V on Internal Plane 1 (split plane): 3764.9,285.1 3700.1,285.1 3700.1,1689.9 3764.9,1689.9
12V on Internal Plane 1 (split plane): 4659.9,270.1 4595.1,270.1 4595.1,2144.9 4659.9,2144.9
GND on Internal Plane 1 (split plane): 2994.9,20.1 238.71,20.1 216.23,22.31 194.07,26.72 172.45,33.27 151.59,41.92 131.66,52.57 112.88,65.12 95.42,79.45 79.45,95.42 65.12,112.88 52.57,131.66 41.92,151.59 33.27,172.45 26.72,194.07 22.31,216.23 20.1,238.71 20.1,250 20.1,1070.9 883,1070.9 886.92,1071.29 890.69,1072.43 894.17,1074.29 897.21,1076.79 899.71,1079.83 901.57,1083.31 902.71,1087.08 903.1,1091 903.1,1978 902.71,1981.92 901.57,1985.69 899.71,1989.17 897.21,1992.21 894.17,1994.71 890.69,1996.57 886.92,1997.71 883,1998.1 20.1,1998.1 20.1,2550 20.1,2561.29 22.31,2583.77 26.72,2605.93 33.27,2627.55 41.92,2648.41 52.57,2668.34 65.12,2687.12 79.45,2704.58 95.42,2720.55 112.88,2734.88 131.66,2747.43 151.59,2758.08 172.45,2766.73 194.07,2773.28 216.23,2777.69 238.71,2779.9 2994.9,2779.9
PGND on Internal Plane 1 (split plane): 5079.9,20.1 3005.1,20.1 3005.1,2779.9 5079.9,2779.9
VBat on Internal Plane 2 (split plane): 5079.9,20.1 3005.1,20.1 3005.1,2779.9 5079.9,2779.9
5V on Internal Plane 2 (split plane): 2994.9,20.1 238.71,20.1 216.23,22.31 194.07,26.72 172.45,33.27 151.59,41.92 131.66,52.57 112.88,65.12 95.42,79.45 79.45,95.42 65.12,112.88 52.57,131.66 41.92,151.59 33.27,172.45 26.72,194.07 22.31,216.23 20.1,238.71 20.1,250 20.1,1070.9 883,1070.9 886.92,1071.29 890.69,1072.43 894.17,1074.29 897.21,1076.79 899.71,1079.83 901.57,1083.31 902.71,1087.08 903.1,1091 903.1,1978 902.71,1981.92 901.57,1985.69 899.71,1989.17 897.21,1992.21 894.17,1994.71 890.69,1996.57 886.92,1997.71 883,1998.1 20.1,1998.1 20.1,2550 20.1,2561.29 22.31,2583.77 26.72,2605.93 33.27,2627.55 41.92,2648.41 52.57,2668.34 65.12,2687.12 79.45,2704.58 95.42,2720.55 112.88,2734.88 131.66,2747.43 151.59,2758.08 172.45,2766.73 194.07,2773.28 216.23,2777.69 238.71,2779.9 2994.9,2779.9

## Other copper
Internal Plane 1 (plane layer: these items are gaps in the copper):
  lines w10: 3000,0 3000,2800 ; 3695,280 3770,280 3770,1695 3695,1695 3695,280 ; 4590,265 4665,265 4665,2150 4590,2150 4590,265
Internal Plane 2 (plane layer: these items are gaps in the copper):
  lines w10: 3000,0 3000,2800

## Silkscreen, mask and mechanical layers (free items; w line width, h text height)
Top Overlay:
  text "No one dances sober, unless he is insane." at 1425,2430 h40
  text "5V" at 2850,2070 h35
  text "PWR2" at 2815,1900 h35
  text "PWR1" at 2820,1715 h35
  text "VBat" at 2810,1550 h35
  text "FET / Drive / Supply / Select" at 3165,730 h35
Mechanical 3:
  lines w1: -25,0 25,0 ; 0,-25 0,25 ; 0,250 ccw(c250,250) 250,0 5100,0 5100,2800 250,2800 ccw(c250,2550) 0,2550 0,1978 883,1978 883,1091 0,1091 0,250 ; 1655,1215 ccw(c1685,1215) 1685,1185 2675,1185 ccw(c2675,1215) 2705,1215 2705,2205 ccw(c2675,2205) 2675,2235 1685,2235 ccw(c1685,2205) 1655,2205 1655,1215

## Text inside footprints (layer, text, board x,y; h text height)
J1_FET1_FET1: Top Overlay "1" at 4215,2405 h40; Top Overlay "B" at 4280,2430 h40; Top Overlay "2" at 4355,2405 h40
J1_FET1_FET2: Top Overlay "2" at 3455,2405 h40; Top Overlay "B" at 3380,2430 h40; Top Overlay "1" at 3315,2405 h40
J1_FET1_FET3: Top Overlay "1" at 4215,1955 h40; Top Overlay "B" at 4280,1980 h40; Top Overlay "2" at 4355,1955 h40
J1_FET1_FET4: Top Overlay "2" at 3455,1955 h40; Top Overlay "B" at 3380,1980 h40; Top Overlay "1" at 3315,1955 h40
J1_FET1_FET5: Top Overlay "1" at 4215,1505 h40; Top Overlay "B" at 4280,1530 h40; Top Overlay "2" at 4355,1505 h40
J1_FET1_FET6: Top Overlay "2" at 3455,1505 h40; Top Overlay "B" at 3380,1530 h40; Top Overlay "1" at 3315,1505 h40
J1_FET1_FET7: Top Overlay "1" at 4215,1055 h40; Top Overlay "B" at 4280,1080 h40; Top Overlay "2" at 4355,1055 h40
J1_FET1_FET8: Top Overlay "2" at 3455,1055 h40; Top Overlay "B" at 3380,1080 h40; Top Overlay "1" at 3315,1055 h40
J1_FET1_FET9: Top Overlay "1" at 4215,605 h40; Top Overlay "B" at 4280,630 h40; Top Overlay "2" at 4355,605 h40
J1_FET1_FET10: Top Overlay "2" at 3455,605 h40; Top Overlay "B" at 3380,630 h40; Top Overlay "1" at 3315,605 h40
J6: Top Overlay "2" at 3115,970 h40; Top Overlay "B" at 3040,995 h40; Top Overlay "1" at 2975,970 h40